# Altium PCB System Control.PcbDoc (part 4 of 7)
Units mil, origin at the board's own origin, x right, y up, seen from the top; angles counter-clockwise.
Board outline 5312.56 x 5103.22 mil, 12 copper layers (Top, GND 2, Signal 3, Signal 4, 3.3V 5, Signal 6, Signal 7, 2.5V 8, Signal 9, Signal 10, GND 11, Bottom); 503 components, 484 nets, 2219 pads, 1158 vias.
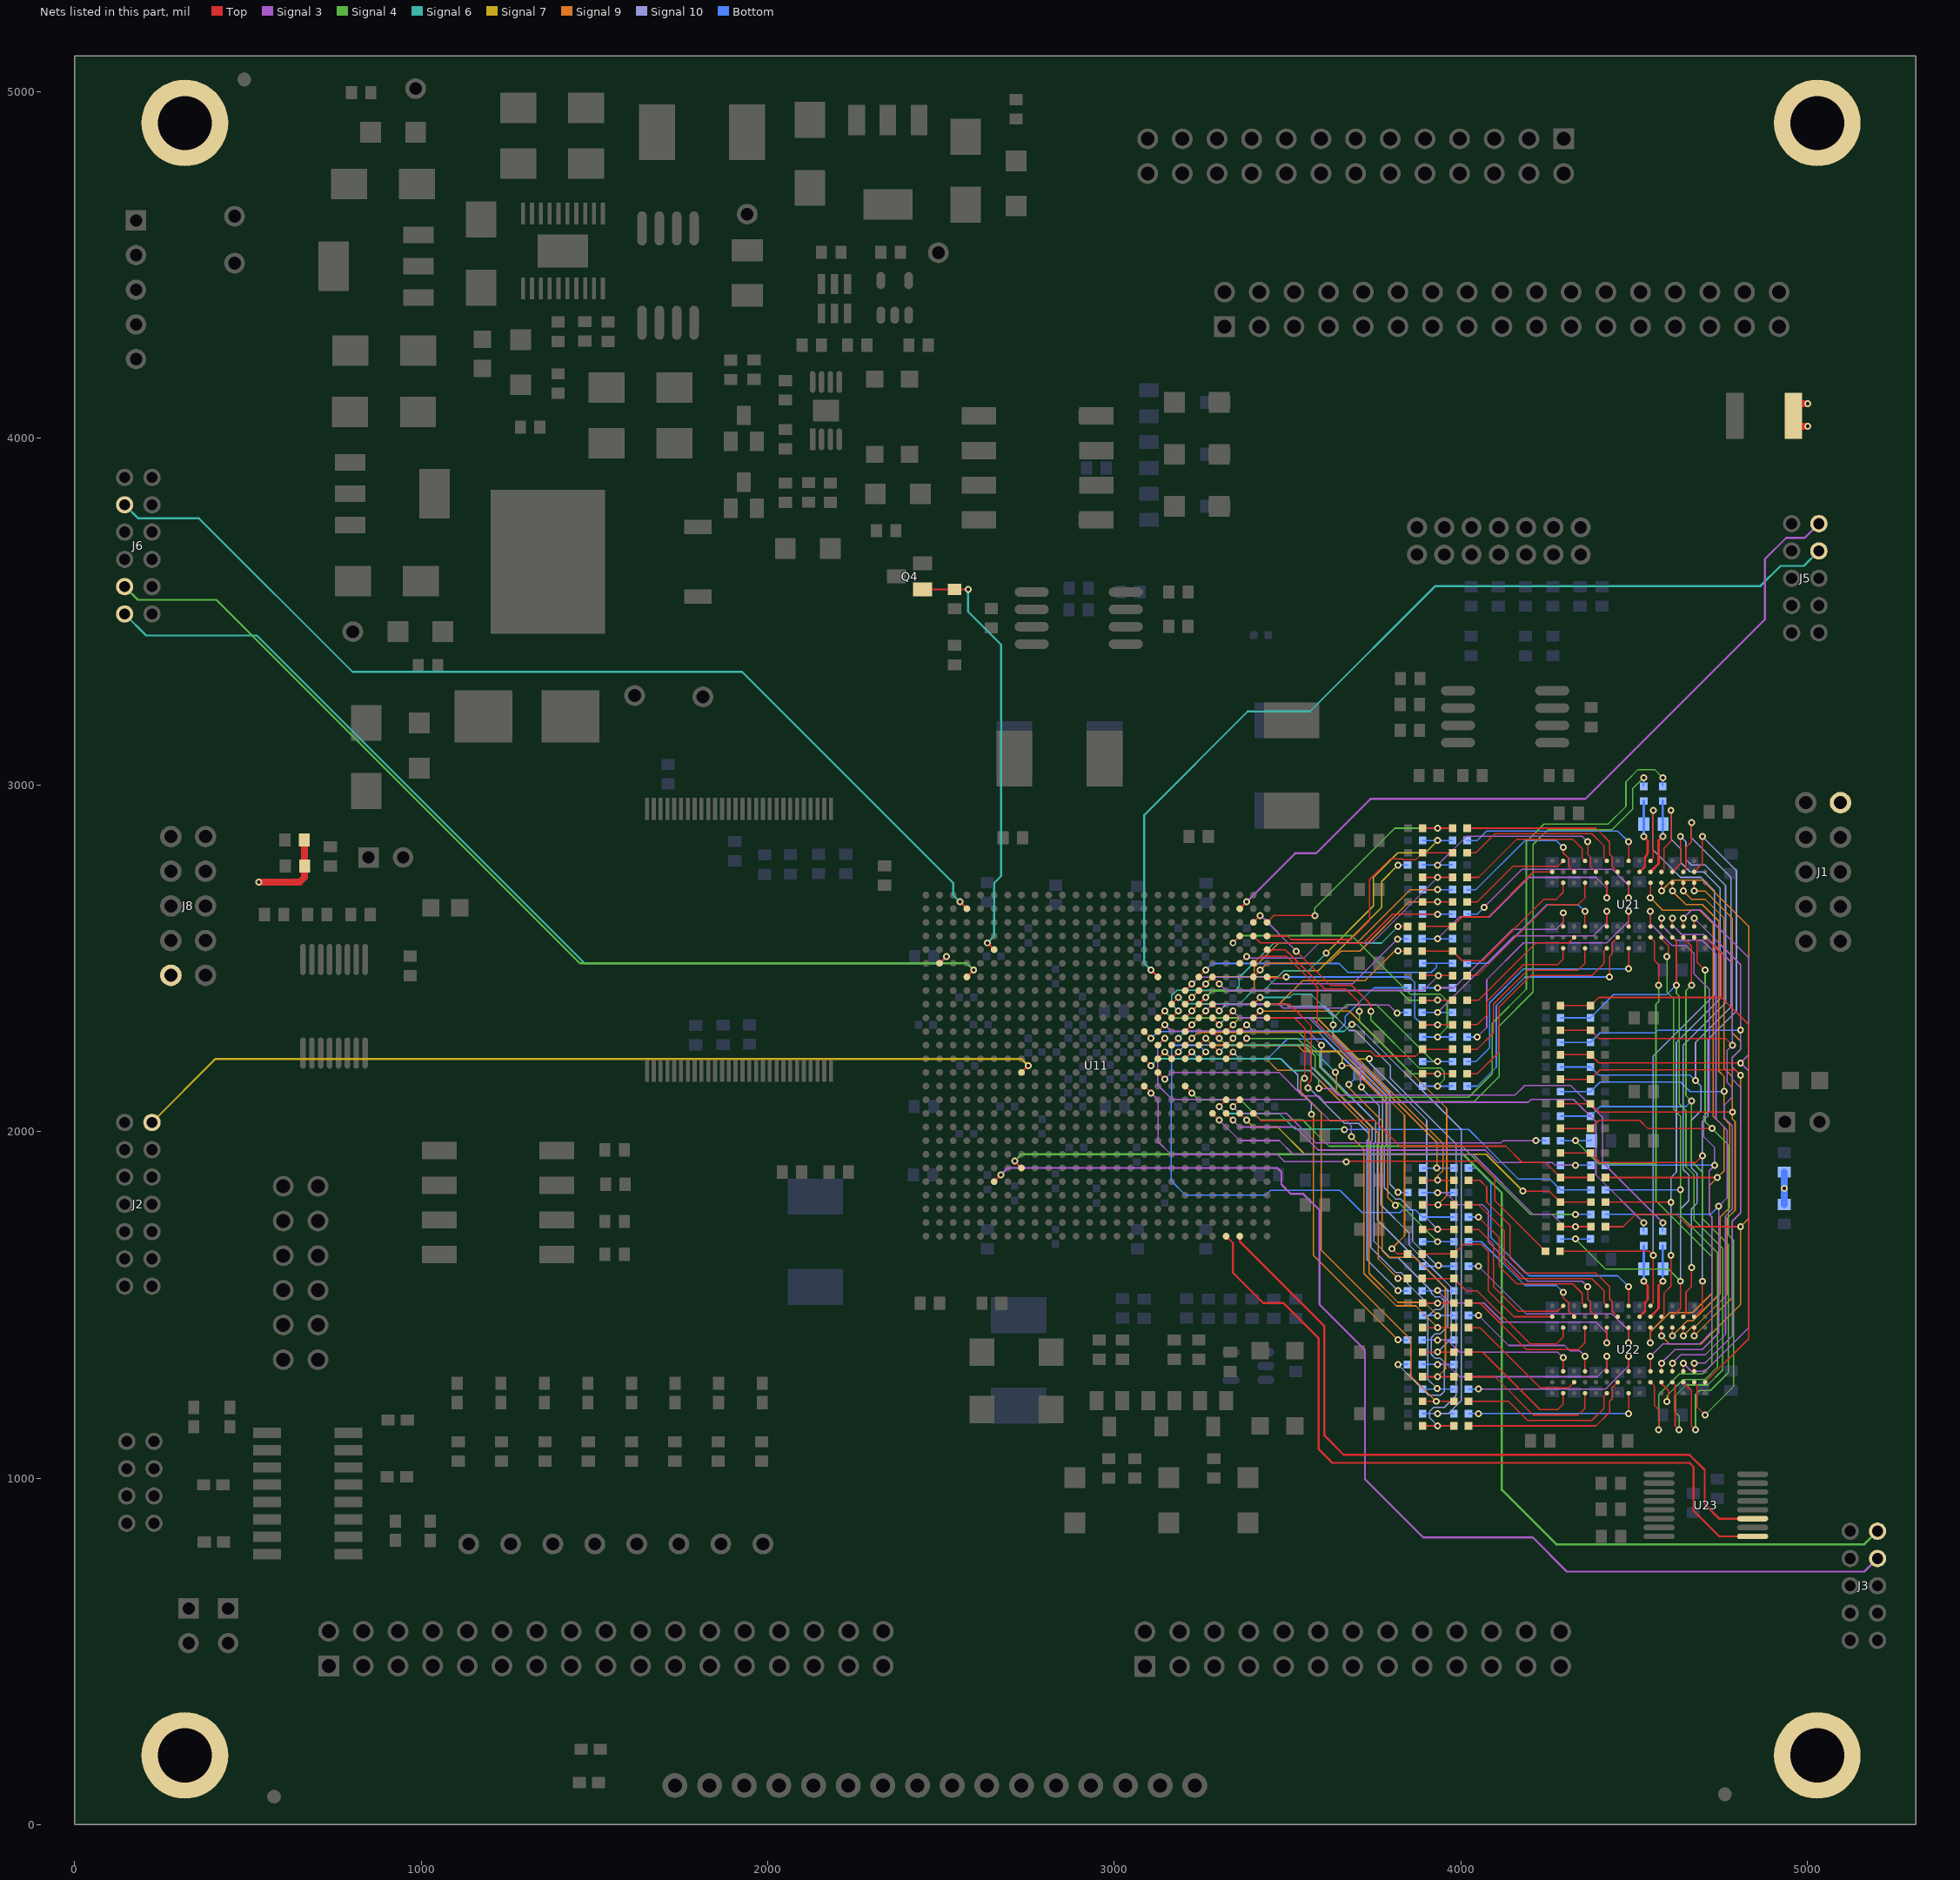
[diagram p14: the nets of this part, all layers, seen from the top]

## Via types
v1: diameter 20, hole 10, Top to Bottom, tented top, 1040 vias
v2: diameter 20, hole 8, Top to Bottom, tented top, 118 vias

## Nets (pads, with @x,y where several pads share a name; then routed paths per layer and width w, separated by ;. In a path a pad name is that pad's centre, name@x,y a point inside that pad or via, vN(x,y) a via of type N, cw(c..) or ccw(c..) an arc to the next point about the centre after c; other vN are vias at no path point) (continued)
DDR_BS0: R267.1 R280.2 U11.L4 | length 1201.5
  Top w4.02: v1(3302.7,2072.04) U11.L4@3322.39,2091.73
  Signal 6 w4.02: v1(3302.7,2072.04) 3322.75,2052 3475.7,2052 3520.61,2007.09 3661.83,2007.09 v1(3663.36,2005.56)
  Bottom w4.02: v1(3663.36,2005.56) 3663.36,2007 3664.08,2006.28 3664.57,2005.78 4022.51,2005.78 4074.36,1953.94 4164.91,1863.39 4255.46,1863.39 R267.1@4286.96,1831.89 R280.2@4374.88,1831.89
DDR_BS1: R268.1 R281.2 U11.M7 | length 1367.2
  Top w4.02: U11.M7@3204.28,2131.1 v1(3223.97,2111.42)
  Signal 4 w4.02: v1(3223.97,2111.42) 3243.65,2091.73 3364,2091.73 3421.77,2033.96 3542.96,2033.96 3619.04,1957.87 4003.49,1957.87 4200.34,1761.02 v1(4330.26,1761.02)
  Bottom w4.02: R268.1@4286.96,1761.02 v1(4330.26,1761.02) R281.2@4374.88,1761.02
DDR_C\A\S\: R111.1 R115.2 U11.K5 | length 1270.5
  Top w4.02: U11.K5@3283.02,2052.36 v1(3302.71,2032.67) ; R111.1@4286.96,1725.59 v1(4330.26,1725.59) R115.2@4374.88,1725.59
  Signal 3 w4.02: v1(3302.71,2032.67) 3361.38,1974 3475.58,1974 3515.33,1934.25 4034.99,1934.25 4208.22,1761.02 4263.34,1761.02 4298.77,1725.59 v1(4330.26,1725.59)
DDR_C\L\K\0\: R289.2 U11.R4 | length 2180.5
  Top w4.02: U11.R4@3322.39,2249.21 v1(3342.08,2268.9)
  Signal 4 w4.02: v1(3342.08,2268.9) 3361.76,2288.58 3529.42,2288.58 3592.36,2225.64 3592.36,2185.36 3678.72,2099 4022.57,2099 4090.11,2166.54 4090.11,2312.2 4188.53,2410.63 4188.53,2835.83 4239.71,2887.01 4424.75,2887.01 4475.93,2938.19 4475.93,3009.06 4511.37,3044.49 4558.61,3044.49 v1(4582.23,3020.87)
  Bottom w4.02: R289.2@4582.23,2995.94 v1(4582.23,3020.87)
DDR_C\L\K\1\: R290.2 U11.P10 | length 1846.8
  Top w4.02: U11.P10@3086.17,2209.84 v1(3105.86,2190.16)
  Signal 3 w4.02: v1(3589.68,2124.15) 3624.88,2124.15 3644.03,2105 4156,2105 4184.07,2133.07 4316.48,2133.07 4409,2040.55 4409,1910.63 v1(4582.23,1737.4)
  Signal 6 w4.02: v1(3105.86,2190.16) 3125.7,2210 3479,2210 3513.89,2175.11 3563.11,2175.11 3589.68,2148.54 v1(3589.68,2124.15)
  Bottom w4.02: R290.2@4582.23,1712.47 v1(4582.23,1737.4)
DDR_C\S\: R110.1 R114.2 U11.K3 | length 1119.1
  Top w4.02: U11.K3@3361.76,2052.36 v1(3381.45,2032.67) ; v1(4178.91,1828.11) 4255.3,1828.11 R110.1@4286.96,1796.46 R114.2@4374.88,1796.46
  Signal 7 w4.02: v1(3381.45,2032.67) 3401.12,2013 3470.55,2013 3549.2,1934.35 4072.67,1934.35 v1(4178.91,1828.11)
DDR_CKE: R265.2 U11.L3 | length 976.4
  Top w4.02: v1(3342.07,2072.04) U11.L3@3361.76,2091.73
  Signal 3 w4.02: v1(3342.07,2072.04) 3361.88,2052.24 3496.29,2052.24 3580.89,1967.64 4115.62,1967.64 4121.6,1973.62 v1(4216.09,1973.62)
  Bottom w4.02: v1(4216.09,1973.62) R265.2@4244.95,1973.62
DDR_CLK0: R284.2 U11.R3 | length 2052.7
  Top w4.02: U11.R3@3361.76,2249.21 v1(3381.45,2268.9)
  Signal 4 w4.02: v1(3381.45,2268.9) 3528.1,2268.9 3578.96,2218.04 3578.96,2180.04 3673,2086 4037.13,2086 4109.79,2158.66 4109.79,2304.33 4208.22,2402.76 4208.22,2827.95 4251.52,2871.26 4436.56,2871.26 4495.62,2930.31 4495.62,2989.37 v1(4527.11,3020.87)
  Bottom w4.02: R284.2@4527.11,2995.94 v1(4527.11,3020.87)
DDR_CLK1: R286.2 U11.N9 | length 1719.5
  Top w4.02: U11.N9@3125.54,2170.47 v1(3145.23,2150.79)
  Signal 3 w4.02: v1(3145.23,2150.79) 3165.44,2171 3474.81,2171 3542.79,2103.02 3564.82,2103.02 ; 3564.83,2103.03 3588.97,2103.03 3607.38,2084.62 4194.36,2084.62 4202.74,2093 4325.06,2093 4389.32,2028.74 4389.32,1875.2 v1(4527.11,1737.4)
  Bottom w4.02: R286.2@4527.12,1712.47 v1(4527.11,1737.4)
DDR_D0: R51.1 R76.1 U11.AD1 | length 703.7
  Top w4.02: U11.AD1@3440.5,2603.54 3460.19,2623.23 v1(3578.3,2623.23) ; R51.1@3889.32,2875.2 v1(3932.63,2875.2) R76.1@3975.93,2875.2
  Signal 4 w4.02: v1(3578.3,2623.23) 3578.3,2644.49 3809,2875.2 v1(3932.63,2875.2)
DDR_D1: R202.1 R230.1 U11.AD2 | length 907.5
  Top w4.02: U11.AD2@3401.13,2603.54 v1(3420.82,2623.23) ; v1(3524.79,2520.59) 3623.77,2421.61 3684.46,2421.61 3739.91,2366.16 v1(3739.91,2346.93)
  Signal 3 w4.02: v1(3420.82,2623.23) 3422.15,2623.23 v1(3524.79,2520.59)
  Signal 4 w4.02: v1@3740.12,2346.93 3740.12,2322.18 3878.83,2183.46 3940.75,2183.46 3952.47,2171.75 3952.47,2150.94 v1(3932.63,2131.1)
  Bottom w4.02: R202.1@3889.32,2131.1 v1(3932.63,2131.1) R230.1@3975.93,2131.1
DDR_D2: R195.1 R223.1 U11.AC2 | length 661.6
  Top w4.02: U11.AC2@3401.13,2564.17 3420.81,2544.49 3504.14,2544.49 3505.5,2543.13 3718.67,2543.13 3802.71,2627.17 v1(3932.63,2627.17)
  Bottom w4.02: R195.1@3889.32,2627.17 v1(3932.63,2627.17) R223.1@3975.93,2627.17
DDR_D3: R198.1 R226.1 U11.AC3 | length 934.5
  Top w4.02: v1(3342.07,2544.49) U11.AC3@3361.76,2564.17
  Signal 4 w4.02: v1(3342.07,2544.49) 3362.78,2565.19 3684.38,2565.19 3852.73,2396.85 3939.96,2396.85 3960.19,2376.63 3960.19,2300.39 v1(3932.63,2272.83)
  Bottom w4.02: R198.1@3889.32,2272.83 v1(3932.63,2272.83) R226.1@3975.93,2272.83
DDR_D4: R201.1 R231.1 U11.U9 | length 993.7
  Top w4.02: U11.U9@3125.54,2327.95 v1(3145.23,2347.64)
  Signal 4 w4.02: v1(3145.23,2347.64) 3165.07,2327.79 3631.64,2327.79 3669.71,2365.86 3755.89,2365.86 3919.79,2201.97 v1(3932.63,2201.97)
  Bottom w4.02: R201.1@3889.32,2201.97 v1(3932.63,2201.97) R231.1@3975.93,2201.97
DDR_D5: R192.1 R221.1 U11.V8 | length 1114.9
  Top w4.02: U11.V8@3164.91,2367.32 v1(3184.6,2387.01)
  Signal 7 w4.02: v1(3611.52,2515.27) 3747.59,2651.34 3747.59,2734.29 3817.63,2804.33 3897.19,2804.33 v1(3932.63,2839.76)
  Signal 6 w4.02: v1@3185.01,2387.01 v1(3184.6,2387.01) 3203.26,2368.35 3361.34,2368.35 3398.67,2405.67 3428.67,2405.67 3430.61,2405.67 3471.94,2447 3488.66,2463.72 3559.96,2463.72 v1(3611.52,2515.27) 3611.76,2515.27 v1@3611.64,2515.16
  Bottom w4.02: R192.1@3889.32,2839.76 v1(3932.63,2839.76) R221.1@3975.93,2839.76
DDR_D6: R60.1 R85.1 U11.AB1 | length 759.1
  Top w4.02: U11.AB1@3440.5,2524.8 3492.66,2524.8 3501.48,2515.98 3502.36,2515.98 3606.65,2411.69 3667.31,2411.69 3707,2372.01 v1(3707,2346.93) ; R60.1@3889.32,2166.53 R85.1@3975.93,2166.53
  Signal 4 w4.02: v1@3707.15,2346.93 3707.15,2317.21 3857.82,2166.54 3897.19,2166.54 v1@3932.63,2166.54
  other v1: 3932.63,2165.75
DDR_D7: R52.1 R77.1 U11.AC1 | length 714.8
  Top w4.02: U11.AC1@3440.5,2564.17 3440.67,2564 3500,2564 3510,2554 3682.22,2554 3682.64,2554.41 3736.4,2608.18 3736.4,2726.61 3797,2787.21 3830.14,2787.21 3832.71,2784.63 3869.62,2784.63 R52.1@3889.32,2804.33 3932.63,2804.33 R77.1@3975.93,2804.33
DDR_D8: R193.1 R224.1 U11.V7 | length 985.3
  Top w4.02: U11.V7@3204.28,2367.32 v1(3223.97,2387.01)
  Signal 9 w4.02: v1(3223.97,2387.01) 3243.65,2406.69 3393.69,2406.69 3403.1,2416.1 3403.1,2473.09 3474.5,2544.49 3700.34,2544.49 3853.89,2698.03 v1(3932.63,2698.03)
  Bottom w4.02: R193.1@3889.32,2698.03 v1(3932.63,2698.03) R224.1@3975.93,2698.03
DDR_D9: R56.1 R83.1 U11.V6 | length 803.4
  Top w4.02: R56.1@3889.32,2379.13 v1(3932.62,2379.11) R83.1@3975.93,2379.13
  Top w5.91: U11.V6@3243.65,2367.32 v1(3263.34,2387.01)
  Signal 4 w4.02: 3475.34,2406.69 3822.54,2406.69 3850.24,2379 3932.51,2379 v1(3932.62,2379.11)
  Signal 4 w5.91: v1(3263.34,2387.01) 3283.02,2406.69 3475.34,2406.69
DDR_D10: R58.1 R82.1 U11.Y5 | length 777.8
  Top w4.02: U11.Y5@3283.02,2446.06 v1(3302.71,2426.38) ; R58.1@3889.32,2450 3934.87,2450 R82.1@3975.93,2450
  Signal 3 w4.02: v1(3302.71,2426.38) 3322.08,2407 3891.95,2407 v1(3934.87,2449.92)
  Signal 7 w4.02: v1@3931.05,2446.1 v1(3934.87,2449.92)
DDR_D11: R196.1 R227.1 U11.Y6 | length 817.3
  Top w4.02: U11.Y6@3243.65,2446.06 v1(3263.34,2465.75)
  Bottom w4.02: v1(3263.34,2465.75) 3282.59,2485 3648.16,2485 3674.23,2458.93 3914.55,2458.93 3929.87,2474.25 3929.87,2485.43 ; R196.1@3889.32,2485.43 3929.87,2485.43 ; R227.1@3975.93,2485.43 3929.87,2485.43
DDR_D12: R61.1 R86.1 U11.AA2 | length 771.4
  Top w4.02: U11.AA2@3401.13,2485.43 3420.82,2505.12 3497.86,2505.12 3499,2503.98 3586.25,2416.73 3586.25,2402.01 3585.97,2401.74 3585.97,2312.79 3666.68,2232.09 3739.42,2232.09 3753.81,2217.7 3869.62,2217.7 R61.1@3889.32,2237.4 3932.63,2237.4 R86.1@3975.93,2237.4
DDR_D13: R54.1 R78.1 U11.AA3 | length 763.6
  Top w4.02: U11.AA3@3361.76,2485.43 v1(3381.45,2505.12) ; R54.1@3889.32,2733.46 v1(3932.63,2733.46) R78.1@3975.93,2733.46
  Signal 3 w4.02: v1(3381.45,2505.12) 3385.56,2501 3547,2501 3590.01,2544.01 3743.18,2544.01 v1(3932.63,2733.46)
DDR_D14: R59.1 R84.1 U11.Y1 | length 711.3
  Top w4.02: U11.Y1@3440.5,2446.06 3443.56,2443 3493,2443 v1(3496,2446) ; R59.1@3889.32,2308.27 v1(3932.63,2308.27) R84.1@3975.93,2308.27
  Bottom w4.02: v1@3489.04,2446 v1(3496,2446) ; v1@3489.04,2446.03 3850.53,2446.03 3867.13,2429.43 3867.13,2328.61 3887.47,2308.27 v1(3932.63,2308.27)
DDR_D15: R53.1 R79.1 U11.Y2 | length 707.8
  Top w4.02: U11.Y2@3401.13,2446.06 v1(3420.82,2465.75) ; R53.1@3889.32,2662.6 v1(3932.63,2662.6) R79.1@3975.93,2662.6
  Signal 9 w4.02: v1(3420.82,2465.75) 3440.5,2485.43 3475.34,2485.43 3617.67,2485.43 3626.92,2494.68 3628.33,2496.09 3653.1,2520.87 3708.22,2520.87 3849.95,2662.6 v1(3932.63,2662.6)
DDR_D16: R62.1 R87.1 U11.T7 | length 1112.9
  Top w4.02: U11.T7@3204.28,2288.58 v1(3223.97,2308.27) ; R62.1@3889.32,1859.45 v1(3932.63,1859.45) R87.1@3979.87,1859.45
  Signal 9 w4.02: v1(3223.97,2308.27) 3243.49,2327.79 3585.63,2327.79 3947.98,1965.45 3947.98,1887.62 3932.63,1872.27 v1(3932.63,1859.45)
DDR_D17: R72.1 R97.1 U11.V5 | length 1870.8
  Top w4.02: U11.V5@3283.02,2367.32 v1(3302.71,2347.64) ; R72.1@3889.32,1150.79 v1(3932.63,1150.79) R97.1@3979.87,1150.79
  Signal 10 w4.02: v1(3302.71,2347.64) 3322.07,2367 3497,2367 3502.78,2361.22 3608.05,2361.22 3677.65,2291.62 3694.38,2291.62 3796.8,2189.2 3796.8,2153.2 3986,1964 3986,1238 3952,1204 3921,1204 3909.02,1192.02 3909.02,1174.4 v1(3932.63,1150.79)
DDR_D18: R207.1 R237.1 U11.U5 | length 1267.8
  Top w4.02: U11.U5@3283.02,2327.95 v1(3302.71,2308.27)
  Signal 10 w4.02: v1(3302.71,2308.27) 3322.39,2327.95 3475.34,2327.95 3561.21,2327.95 3586.08,2303.08 3783.53,2105.63 3783.53,1958.76 3778.84,1954.07 3778.84,1837.74 3810.87,1805.71 3825.36,1805.71 3859.87,1771.2 3859.87,1684.17 3930.36,1613.69 v1(3934.9,1613.69)
  Bottom w4.02: R207.1@3889.32,1611.42 v1@3932.63,1611.42 ; v1(3934.9,1613.69) 3937.18,1611.42 R237.1@3979.87,1611.42
DDR_D19: R210.1 R241.1 U11.T9 | length 1800.1
  Top w4.02: U11.T9@3125.54,2288.58 v1(3145.23,2308.27)
  Signal 3 w4.02: v1(3145.23,2308.27) 3163.89,2289.61 3277.61,2289.61 3557.66,2289.61 v1@3597.43,2249.84
  Signal 10 w4.02: v1@3596.88,2249.08 3596.88,2185.71 3753.76,2028.82 3753.76,1971.09 3749.07,1966.4 3749.07,1682.93 3796,1636 3818.93,1636 3914.31,1540.62 3914.31,1534.16 3925.05,1523.43 3940.21,1523.43 3950.93,1512.7 3950.93,1497.54 3940.21,1486.81 3925.04,1486.81 3904.39,1466.16 3904.39,1285.32 3931,1258.71 v1(3931,1259)
  Bottom w4.02: R210.1@3889.32,1257.09 v1@3932.63,1257.09 ; v1(3931,1259) 3931,1258.71 v1@3932.63,1257.09 ; R241.1@3979.87,1257.09 v1@3932.63,1257.09
  other v1: 3597.43,2249.09
DDR_D20: R213.1 R242.1 U11.R8 | length 1944.5
  Top w4.02: U11.R8@3164.91,2249.21 v1(3184.6,2268.9)
  Signal 10 w4.02: v1(3684.99,2309.34) 3697.61,2309.34 4000.62,2006.33 4000.62,1223.62 3963.22,1186.22 v1(3932.63,1186.22)
  Signal 6 w4.02: v1(3184.6,2268.9) 3205.3,2289.61 3310.44,2289.61 3622.64,2289.61 3623.22,2289.03 3662.58,2289.03 3681,2307.44 3684.99,2307.44 v1(3684.99,2309.34)
  Bottom w4.02: R213.1@3889.32,1186.22 v1(3932.63,1186.22) R242.1@3979.87,1186.22
DDR_D21: R203.1 R233.1 U11.R7 | length 1038.2
  Top w4.02: U11.R7@3204.28,2249.21 v1(3223.97,2268.9)
  Signal 9 w4.02: v1(3223.97,2268.9) 3241.68,2286.61 3612.78,2286.61 3930.81,1968.58 3930.81,1895.51 v1(3930.26,1894.96)
  Bottom w4.02: R203.1@3889.32,1894.88 3930.26,1894.88 R233.1@3979.87,1894.88
DDR_D22: R71.1 R96.1 U11.U1 | length 1465.1
  Top w4.02: U11.U1@3440.5,2327.95 3518.84,2327.95 3548.88,2297.91 3548.88,2154.01 v1(3548.49,2153.62) ; R71.1@3889.32,1221.65 3932.62,1221.65 R96.1@3979.87,1221.65
  Signal 9 w4.02: v1(3548.49,2153.62) 3545.12,2153.62 3538,2146.51 3538,2114 3596.76,2055.24 3596.76,1658.02 3855.77,1399 3855.77,1293.23 3927.35,1221.65 3931.4,1221.65 3932.62,1220.44 3931.34,1221.72 v1(3929.21,1221.72)
DDR_D23: R63.1 R88.1 U11.U2 | length 1061.4
  Top w4.02: U11.U2@3401.13,2327.95 v1(3420.82,2347.64) ; R63.1@3889.32,1788.58 R88.1@3979.87,1788.58
  Signal 9 w4.02: v1(3420.82,2347.64) 3678.09,2347.64 3958.88,2066.85 3958.88,1814.85 3953.65,1809.61 3933.88,1789.84 v1(3933.88,1788.59)
DDR_D24: R205.1 R235.1 U11.T5 | length 1181.2
  Top w4.02: U11.T5@3283.02,2288.58 v1(3302.71,2268.9) ; v1@3810.63,1793.47 v1@3811.17,1794.01 ; v1(3811.19,1787.36) v1@3811.19,1793.99
  Signal 4 w4.02: v1(3811.19,1787.36) 3811.19,1793.99 3820.9,1794.01 v1(3932.63,1682.28)
  Signal 9 w4.02: v1(3656.88,2190.51) 3678.49,2190.51 3789,2080 3789,1809.55 v1(3811.19,1787.36)
  Signal 7 w4.02: v1(3302.71,2268.9) 3322.55,2249.05 3558.01,2249.05 3575.69,2231.37 3625.94,2231.37 3626.08,2231.5 3640.75,2231.5 3656.88,2215.37 v1(3656.88,2190.51)
  Bottom w4.02: R205.1@3889.32,1682.28 v1(3932.63,1682.28) R235.1@3979.87,1682.28
DDR_D25: R68.1 R93.1 U11.R9 | length 1587.4
  Top w4.02: U11.R9@3125.54,2249.21 v1(3145.23,2268.9) ; R68.1@3889.32,1434.25 v1(3932.63,1434.25) R93.1@3979.87,1434.25
  Signal 3 w4.02: v1(3145.23,2268.9) 3125,2248.67 3125,2134.22 3166.12,2093.1 3559.9,2093.1 3621.37,2031.63 3668.99,2031.63 3683.69,2016.93 v1(3683.69,1985.95)
  Signal 9 w4.02: v1(3683.69,1985.95) 3683.69,1985.31 3720.03,1948.97 3720.03,1590.82 3813.53,1497.32 3869.68,1497.32 3932.63,1434.37 v1(3932.63,1434.25)
DDR_D26: R66.1 R91.1 U11.P8 | length 1421.4
  Top w4.02: U11.P8@3164.91,2209.84 v1(3184.6,2229.53) ; R66.1@3889.32,1505.12 v1(3932.63,1505.12) R91.1@3979.87,1505.12
  Signal 10 w4.02: v1(3184.6,2229.53) 3204.28,2249.21 3543.79,2249.21 3568.15,2224.85 3568.15,2187.15 3743.84,2011.46 3743.84,1975.2 3739.15,1970.51 3739.15,1665.67 3811.11,1593.7 3826.3,1593.7 3846,1574 3846,1561.43 3902.31,1505.12 v1(3932.63,1505.12)
DDR_D27: R208.1 R238.1 U11.P9 | length 1464.6
  Top w4.02: U11.P9@3125.54,2209.84 v1(3145.23,2229.53)
  Signal 9 w4.02: v1(3145.23,2229.53) 3164.91,2209.84 3438,2209.84 3470.89,2176.95 3562.95,2176.95 3734.55,2005.35 3734.55,1590.75 3818.06,1507.24 3895.05,1507.24 v1@3932.62,1469.68
  Bottom w4.02: R208.1@3889.32,1469.68 v1@3932.63,1469.68 ; v1(3932.62,1468.5) v1@3932.62,1469.68 ; R238.1@3979.87,1469.68 v1@3932.63,1469.68
DDR_D28: R70.1 R94.1 U11.P7 | length 1715.4
  Top w4.02: U11.P7@3204.28,2209.84 v1(3223.97,2229.53) ; R70.1@3889.32,1292.52 v1(3932.63,1292.52) R94.1@3979.87,1292.52
  Signal 9 w4.02: v1(3676.72,2135.43) 3676.72,2126.89 3772.15,2031.45 3772.15,1656.85 3792,1637 3867,1637 3955,1549 3955,1315 3932.63,1292.63 v1(3932.63,1292.52)
  Bottom w4.02: v1(3223.97,2229.53) 3242.49,2211 3287.58,2211 3287.61,2211.04 3317.8,2211.04 3317.84,2211 3329.58,2211 3329.61,2211.04 3359.8,2211.04 3360.84,2210 3442,2210 3498.81,2266.81 3605.72,2266.81 3690.5,2182.03 3690.5,2149.21 v1(3676.72,2135.43)
DDR_D29: R206.1 R234.1 U11.P6 | length 1397.9
  Top w4.02: U11.P6@3243.65,2209.84 v1(3263.34,2229.53)
  Bottom w4.02: v1(3263.34,2229.53) 3243.86,2249 3174,2249 3165,2240 3165,2088.42 3163.71,2087.14 3163.71,1857.76 3204.47,1817 3437,1817 3450.57,1830.57 3650.49,1830.57 3714.83,1766.22 3824.41,1766.22 3832.22,1774.03 3868.44,1774.03 R206.1@3889.32,1753.15 R234.1@3979.87,1753.15
DDR_D30: R69.1 R95.1 U11.T3 | length 1437.5
  Top w4.02: U11.T3@3361.76,2288.58 v1(3381.45,2308.27) ; R69.1@3889.32,1363.39 v1@3932.62,1363.39 ; v1(3932.62,1364.6) v1@3932.62,1363.39 ; R95.1@3979.87,1363.39 v1@3932.63,1363.39
  Signal 10 w4.02: v1(3381.45,2308.27) 3401.71,2288 3479,2288 3587.13,2288 3773.6,2101.52 3773.6,1962.87 3768.92,1958.18 3768.92,1789.21 3849.95,1708.17 3849.95,1672.76 3924.16,1598.54 3971.61,1551.09 3971.61,1402.37 3933.39,1364.15 3933.07,1364.15 v1(3932.62,1364.6)
DDR_D31: R64.1 R89.1 U11.T4 | length 1142.9
  Top w4.02: U11.T4@3322.39,2288.58 v1(3342.08,2308.27) ; R64.1@3889.32,1717.72 v1(3932.63,1717.72) R89.1@3979.87,1717.72
  Signal 10 w4.02: v1(3735.78,2209.84) 3735.78,2198.22 3901.13,2032.87 3901.13,1749.21 v1(3932.63,1717.72)
  Signal 7 w4.02: v1(3342.08,2308.27) 3361.76,2327.95 3475.34,2327.95 3475.42,2328.03 3583.43,2328.03 3701.61,2209.84 v1(3735.78,2209.84)
DDR_L\D\Q\S\0\: R194.1 U11.W6 | length 796.2
  Top w4.02: U11.W6@3243.65,2406.69 v1(3263.34,2426.38)
  Signal 7 w4.02: v1(3263.34,2426.38) 3283.02,2446.06 3453,2446.06 3471.01,2446.06 3488.66,2463.72 3588.09,2463.72 3771.21,2646.83 3771.21,2721.65 v1(3818.45,2768.9)
  Bottom w4.02: v1(3818.45,2768.9) R194.1@3846.01,2768.9
DDR_L\D\Q\S\1\: R55.1 U11.U8 | length 858.8
  Top w4.02: U11.U8@3164.91,2327.95 v1(3184.6,2347.64) ; v1(3818.45,2591.73) R55.1@3846.01,2591.73
  Signal 6 w4.02: v1(3184.6,2347.64) 3165,2367.23 3165,2392.47 3180.53,2408 3348.75,2408 3359.79,2419.04 3359.79,2443.79 3460,2544 3770.72,2544 v1(3818.45,2591.73)
DDR_LDM0: R200.1 U11.U6 | length 646.7
  Top w4.02: U11.U6@3243.65,2327.95 v1(3263.34,2347.64)
  Signal 3 w4.02: v1(3263.34,2347.64) 3283.02,2367.32 3475.34,2367.32 3486.67,2356 3668,2356 3676.64,2364.64 3792.47,2364.64 3813.45,2343.66 3815.58,2343.66 3814.51,2342.6 v1(3815.54,2341.57)
  Bottom w4.02: v1@3807.48,2343.7 3815.54,2343.7 R200.1@3846.01,2343.7
DDR_LDM1: R211.1 U11.U4 | length 1769.3
  Top w4.02: U11.U4@3322.39,2327.95 v1(3342.08,2347.64)
  Signal 3 w4.02: v1(3342.08,2347.64) 3361.76,2327.95 3569.05,2327.95 3709.71,2187.29 3709.71,2128.7 3710.01,2129 v1(3713,2129)
  Signal 10 w4.02: v1(3713,2129) 3710.01,2129 3709.71,2128.7 3763.68,2074.73 3763.68,1966.98 3758.99,1962.29 3758.99,1744.98 3961.69,1542.28 3961.69,1437.42 3960.85,1436.59 3940.21,1415.94 3925.06,1415.94 3914.31,1405.2 3914.31,1357.02 3925.07,1346.26 3940.21,1346.26 3952.35,1334.12 3952.35,1250.92 3940.86,1239.43 3906.97,1239.43 v1(3818.45,1327.95)
  Bottom w4.02: v1(3818.45,1327.95) R211.1@3846.01,1327.95
DDR_LDQS0: R197.1 U11.W7 | length 718.4
  Top w4.02: U11.W7@3204.28,2406.69 v1(3223.97,2426.38)
  Signal 3 w4.02: v1(3223.97,2426.38) 3242.59,2445 3440,2445 3458,2427 3688.44,2427 v1(3817.12,2555.67)
  Bottom w4.02: v1(3817.12,2555.67) R197.1@3846.01,2556.3
DDR_LDQS1: R57.1 U11.U7 | length 721.6
  Top w4.02: U11.U7@3204.28,2327.95 v1(3223.97,2347.64) ; v1(3818.45,2520.87) R57.1@3846.01,2520.87
  Signal 9 w4.02: v1(3223.97,2347.64) 3243.65,2367.32 3475.34,2367.32 3543.59,2435.57 3722.78,2435.57 3808.08,2520.87 v1(3818.45,2520.87)
DDR_MEM_A0: R269.1 R282.1 U21.M8 U22.M8 | length 2091.8
  Top w4.02: U22.M8@4609.79,1465.75 4633.41,1489.37 v1(4633.41,1568.11) ; U21.M8@4609.79,2749.21 4633.41,2772.83 v1(4633.41,2851.57)
  Signal 4 w4.02: v1(4330.26,1690.16) 4416.88,1603.54 4597.98,1603.54 v1(4633.41,1568.11)
  Signal 10 w4.02: v1(4633.41,1568.11) 4633.41,1776.77 4657.04,1800.39 4657.04,1875.2 4641.29,1890.94 4641.29,2249.21 4763.34,2371.26 4763.34,2709.84 4704.28,2768.9 4664.91,2768.9 4649.16,2784.65 4649.16,2835.83 v1(4633.41,2851.57)
  Bottom w4.02: R269.1@4286.96,1690.16 v1(4330.26,1690.16) R282.1@4373.57,1690.16
DDR_MEM_A1: R103.1 R117.1 U21.M3 U22.M3 | length 2099.2
  Top w4.02: R103.1@4286.96,2292.52 R117.1@4373.57,2292.52 4397.19,2268.9 4763.34,2268.9 v1(4783.02,2249.21) ; U22.M3@4609.79,1308.27 v1(4609.79,1331.89) ; U21.M3@4609.79,2591.73 v1(4609.79,2615.35)
  Signal 3 w4.02: v1(4609.79,1331.89) 4633.41,1355.51 4704.28,1355.51 4763.34,1414.57 4763.34,1757.09 4783.02,1776.77 4783.02,2016.93 4759.4,2040.55 4759.4,2075.98 4783.02,2099.61 4783.02,2127.17 4767.27,2142.91 4767.27,2233.46 v1(4783.02,2249.21) 4783.02,2485.43 4700.34,2568.11 4637.35,2568.11 4609.79,2595.67 v1(4609.79,2615.35)
DDR_MEM_A2: R263.1 R277.1 U21.M7 U22.M7 | length 1999.9
  Top w4.02: v1(4609.79,1410.63) U22.M7@4609.79,1434.25 ; v1(4609.79,2694.09) U21.M7@4609.79,2717.72
  Signal 9 w4.02: v1(4609.79,1410.63) 4653.1,1453.94 4668.85,1453.94 4747.59,1532.68 4747.59,1753.15 4775.15,1780.71 4775.15,2020.87 4759.4,2036.61 v1(4759.4,2115.35) 4759.4,2158.66 4743.65,2174.41 4743.65,2607.48 4696.41,2654.72 4649.16,2654.72 v1(4609.79,2694.09)
  Bottom w4.02: R263.1@4286.96,2115.35 R277.1@4373.57,2115.35 4401.13,2142.91 4633.41,2142.91 4660.97,2115.35 v1(4759.4,2115.35)
DDR_MEM_A3: R264.1 R279.1 U21.N2 U22.N2 | length 2094.1
  Top w4.02: U22.N2@4641.29,1276.77 4664.91,1253.15 4664.91,1150.79 v1(4676.72,1138.98) ; U21.N2@4641.29,2560.24 4664.91,2536.61 v1(4664.91,2422.44)
  Signal 4 w4.02: v1(4664.91,2422.44) 4649.16,2406.69 4649.16,2103.54 v1(4664.91,2087.8) 4664.91,1914.57 4696.41,1883.07 4696.41,1749.21 4771.21,1674.41 4771.21,1304.33 4720.03,1253.15 4688.53,1253.15 4676.72,1241.34 v1(4676.72,1138.98)
  Bottom w4.02: R264.1@4286.96,2044.49 R279.1@4373.57,2044.49 4401.13,2072.05 4649.16,2072.05 v1(4664.91,2087.8)
DDR_MEM_A4: R262.1 R276.1 U21.N8 U22.N8 | length 2113.2
  Top w4.02: U22.N8@4641.29,1465.75 4649.16,1473.62 4649.16,1536.61 4664.91,1552.36 v1(4664.91,1607.48) ; U21.N8@4641.29,2749.21 4649.16,2757.09 4649.16,2820.08 4664.91,2835.83 v1(4664.91,2890.94)
  Signal 10 w4.02: v1(4664.91,1607.48) 4664.91,1776.77 4680.66,1792.52 4680.66,1879.13 4664.91,1894.88 4664.91,2032.68 4692.47,2060.24 4692.47,2131.1 v1(4676.72,2146.85) 4676.72,2257.09 4779.08,2359.45 4779.08,2733.46 4664.91,2847.64 v1(4664.91,2890.94)
  Bottom w4.02: R262.1@4286.96,2186.22 R276.1@4373.57,2186.22 4397.19,2162.6 4660.97,2162.6 v1(4676.72,2146.85)
DDR_MEM_A5: R104.1 R119.1 U21.N3 U22.N3 | length 2170
  Top w4.02: R104.1@4286.96,2221.65 R119.1@4373.57,2221.65 4397.19,2198.03 v1(4806.64,2198.03) ; U22.N3@4641.29,1308.27 v1(4641.29,1331.89) ; U21.N3@4641.29,2591.73 v1(4641.29,2615.35)
  Signal 3 w4.02: v1(4641.29,1331.89) 4664.91,1308.27 4704.28,1308.27 4830.26,1434.25 4830.26,2174.41 v1(4806.64,2198.03) 4830.26,2221.65 4830.26,2501.18 4692.47,2638.98 4664.91,2638.98 v1(4641.29,2615.35)
DDR_MEM_A6: R105.1 R120.1 U21.N7 U22.N7 | length 1988.2
  Top w4.02: R105.1@4286.96,2079.92 R120.1@4373.57,2079.92 4397.19,2056.3 v1(4783.02,2056.3) ; v1(4641.29,1410.63) U22.N7@4641.29,1434.25 ; v1(4641.29,2694.09) U21.N7@4641.29,2717.72
  Signal 9 w4.02: v1(4641.29,1410.63) 4668.85,1438.19 4676.72,1438.19 4767.27,1528.74 4767.27,1749.21 4790.89,1772.83 4790.89,2028.74 4783.02,2036.61 v1(4783.02,2056.3) 4783.02,2158.66 4759.4,2182.28 4759.4,2615.35 4704.28,2670.47 4664.91,2670.47 v1(4641.29,2694.09)
DDR_MEM_A7: R107.1 R122.1 U21.P2 U22.P2 | length 2023.6
  Top w4.02: R107.1@4286.96,2009.06 R122.1@4373.57,2009.06 4397.19,2032.68 4515.3,2032.68 4538.93,2009.06 v1(4723.97,2009.06) ; U22.P2@4672.78,1276.77 4680.66,1268.9 4680.66,1205.91 v1(4704.28,1182.28) ; U21.P2@4672.78,2560.24 4680.66,2552.36 4680.66,2489.37 v1(4704.28,2465.75)
  Signal 4 w4.02: v1(4704.28,1182.28) 4786.96,1264.96 4786.96,1686.22 4771.21,1701.97 4771.21,1961.81 v1(4723.97,2009.06) 4704.28,2028.74 v1(4704.28,2465.75)
DDR_MEM_A8: R109.1 R123.1 U21.P8 U22.P8 | length 2018.3
  Top w4.02: R109.1@4286.96,1938.19 R123.1@4373.57,1938.19 4401.13,1910.63 4676.72,1910.63 v1(4696.41,1930.31) ; U22.P8@4672.78,1465.75 4696.41,1489.37 v1(4696.41,1568.11) ; U21.P8@4672.78,2749.21 4696.41,2772.83 v1(4696.41,2851.57)
  Signal 10 w4.02: v1(4696.41,1568.11) v1(4696.41,1930.31) 4696.41,2028.74 4712.15,2044.49 4712.15,2264.96 4794.83,2347.64 4794.83,2753.15 v1(4696.41,2851.57)
DDR_MEM_A9: R261.1 R274.1 U21.P3 U22.P3 | length 2014
  Top w4.02: U22.P3@4672.78,1308.27 v1(4672.78,1331.89) ; U21.P3@4672.78,2591.73 v1(4672.78,2615.35)
  Signal 3 w4.02: v1(4672.78,1331.89) 4704.28,1331.89 4783.02,1410.63 4783.02,1741.34 4806.64,1764.96 4806.64,2127.17 4783.02,2150.79 4783.02,2213.78 4806.64,2237.4 v1(4806.64,2292.52) 4806.64,2481.5 v1(4672.78,2615.35)
  Bottom w4.02: R261.1@4286.96,2257.09 R274.1@4373.57,2257.09 4401.13,2284.65 4558.61,2284.65 4566.48,2292.52 v1(4806.64,2292.52)
DDR_MEM_A10: R260.1 R273.1 U21.M2 U22.M2 | length 2100.2
  Top w4.02: U22.M2@4609.79,1276.77 4617.67,1268.9 4617.67,1150.79 v1(4629.48,1138.98) ; U21.M2@4609.79,2560.24 4621.6,2548.43 v1(4621.6,2422.44)
  Signal 4 w4.02: v1(4621.6,2422.44) 4621.6,2398.82 4629.48,2390.94 4629.48,2079.92 4649.16,2060.24 4649.16,1898.82 4672.78,1875.2 4672.78,1745.28 4755.46,1662.6 4755.46,1312.2 4712.15,1268.9 4649.16,1268.9 4617.67,1237.4 4617.67,1190.16 4629.48,1178.35 v1(4629.48,1138.98)
  Bottom w4.02: R260.1@4286.96,2327.95 R273.1@4373.57,2327.95 4440.5,2394.88 4594.04,2394.88 v1(4621.6,2422.44)
DDR_MEM_A11: R106.1 R121.1 U21.P7 U22.P7 | length 2017.2
  Top w4.02: R106.1@4286.96,2150.79 R121.1@4373.57,2150.79 4401.13,2178.35 4790.89,2178.35 v1(4806.64,2162.6) ; v1(4672.78,1410.63) U22.P7@4672.78,1434.25 ; v1(4672.78,2694.09) U21.P7@4672.78,2717.72
  Signal 9 w4.02: v1(4672.78,1410.63) 4783.02,1520.87 4783.02,1741.34 4806.64,1764.96 v1(4806.64,2162.6) 4783.02,2186.22 4783.02,2213.78 4806.64,2237.4 4806.64,2261.02 4783.02,2284.65 4783.02,2615.35 4704.28,2694.09 v1(4672.78,2694.09)
DDR_MEM_A12: R102.1 R118.1 U21.R2 U22.R2 | length 1862.2
  Top w4.02: R102.1@4286.96,2363.39 R118.1@4373.57,2363.39 4397.19,2387.01 4751.52,2387.01 ; U22.R2@4704.28,1276.77 4830.26,1402.76 4830.26,2308.27 4751.52,2387.01 ; U21.R2@4704.28,2560.24 4751.52,2512.99 4751.52,2387.01
DDR_MEM_BS0: R280.1 U21.L2 U22.L2 | length 1787.4
  Top w4.02: U22.L2@4578.3,1276.77 4578.3,1272.83 4597.98,1253.15 4597.98,1225.59 v1(4594.04,1221.65) ; U21.L2@4578.3,2560.24 4578.3,2556.3 4597.98,2536.61 4597.98,2509.06 v1(4594.04,2505.12)
  Signal 4 w4.02: v1(4594.04,1221.65) 4594.04,1237.4 4641.29,1284.65 4704.28,1284.65 4739.71,1320.08 4739.71,1650.79 4633.41,1757.09 v1(4633.41,1831.89) 4633.41,2044.49 4613.73,2064.17 4613.73,2383.07 4594.04,2402.76 v1(4594.04,2505.12)
  Bottom w4.02: R280.1@4416.88,1831.89 v1(4633.41,1831.89)
DDR_MEM_BS1: R281.1 U21.L3 U22.L3 | length 1913.8
  Top w4.02: U22.L3@4578.3,1308.27 v1(4578.3,1331.89) ; U21.L3@4578.3,2591.73 v1(4578.3,2615.35)
  Signal 3 w4.02: v1(4578.3,1331.89) 4617.67,1371.26 4696.41,1371.26 4743.65,1418.5 v1(4743.65,1784.65) 4767.27,1808.27 4767.27,2005.12 4735.78,2036.61 4735.78,2512.99 4696.41,2552.36 4621.6,2552.36 4578.3,2595.67 v1(4578.3,2615.35)
  Bottom w4.02: R281.1@4416.88,1761.02 4720.03,1761.02 v1(4743.65,1784.65)
DDR_MEM_C\A\S\: R115.1 U21.L7 U22.L7 | length 2172.6
  Top w4.02: R115.1@4416.88,1725.59 4468.06,1725.59 4503.49,1761.02 4621.6,1761.02 4657.04,1725.59 v1(4806.64,1725.59) ; v1(4578.3,1410.63) U22.L7@4578.3,1434.25 ; v1(4578.3,2694.09) U21.L7@4578.3,2717.72
  Signal 9 w4.02: v1(4578.3,1410.63) 4601.92,1387.01 4692.47,1387.01 4806.64,1501.18 v1(4806.64,1725.59) 4830.26,1749.21 4830.26,2591.73 4696.41,2725.59 4609.79,2725.59 v1(4578.3,2694.09)
DDR_MEM_C\L\K\0\: R285.2 R289.1 U21.K8 | length 629.7
  Top w7.01: U21.K8@4546.8,2749.21 4570.42,2772.83 4570.42,2839.76 v1(4582.23,2851.57)
  Bottom w7.01: R285.2@4583.12,2887.01 R285.2@4582.23,2887.01 ; v1(4582.23,2851.57) R285.2@4582.23,2887.01 ; v1(4582.23,2851.57) R285.2@4582.23,2887.01 ; v1(4582.23,2851.57) R285.2@4582.23,2887.01 ; v1(4582.23,2851.57) R285.2@4582.23,2887.01 ; v1(4582.23,2851.57) R285.2@4582.23,2887.01 ; R285.2@4582.23,2887.01 R289.1@4582.23,2953.94 ; R285.2@4582.23,2887.01 R289.1@4582.23,2953.94 ; R285.2@4582.23,2887.01 R289.1@4582.23,2953.94 ; R285.2@4582.23,2887.01 R289.1@4582.23,2953.94 ; R285.2@4582.23,2887.01 R289.1@4582.23,2953.94
DDR_MEM_C\L\K\1\: R287.2 R290.1 U22.K8 | length 629.7
  Top w7.01: U22.K8@4546.8,1465.75 4570.42,1489.37 4570.42,1556.3 v1(4582.23,1568.11)
  Bottom w7.01: R287.2@4583.12,1603.54 R287.2@4582.23,1603.54 ; v1(4582.23,1568.11) R287.2@4582.23,1603.54 ; v1(4582.23,1568.11) R287.2@4582.23,1603.54 ; v1(4582.23,1568.11) R287.2@4582.23,1603.54 ; v1(4582.23,1568.11) R287.2@4582.23,1603.54 ; v1(4582.23,1568.11) R287.2@4582.23,1603.54 ; R287.2@4582.23,1603.54 R290.1@4582.23,1670.47 ; R287.2@4582.23,1603.54 R290.1@4582.23,1670.47 ; R287.2@4582.23,1603.54 R290.1@4582.23,1670.47 ; R287.2@4582.23,1603.54 R290.1@4582.23,1670.47 ; R287.2@4582.23,1603.54 R290.1@4582.23,1670.47
DDR_MEM_C\S\: R114.1 U21.L8 U22.L8 | length 1990.1
  Top w4.02: R114.1@4416.88,1796.46 v1(4605.85,1796.46) ; U22.L8@4578.3,1465.75 4586.17,1473.62 4586.17,1534.65 4605.85,1554.33 v1(4605.85,1642.91) ; U21.L8@4578.3,2749.21 4586.17,2757.09 4586.17,2818.11 4605.85,2837.8 v1(4605.85,2926.38)
  Signal 10 w4.02: v1(4605.85,1642.91) v1(4605.85,1796.46) 4605.85,1867.32 4621.6,1883.07 4621.6,2257.09 4747.59,2383.07 4747.59,2701.97 4700.34,2749.21 4660.97,2749.21 4633.41,2776.77 4633.41,2816.14 4605.85,2843.7 v1(4605.85,2926.38)
DDR_MEM_CKE: R265.1 R275.2 U21.K2 U22.K2 | length 2116.6
  Top w4.02: U22.K2@4546.8,1276.77 4558.61,1264.96 4558.61,1209.84 4570.42,1198.03 v1(4570.42,1138.98) ; U21.K2@4546.8,2560.24 4558.61,2548.43 4558.61,2493.31 4570.42,2481.5 v1(4570.42,2422.44)
  Signal 4 w4.02: v1(4330.26,1973.62) 4397.19,1906.69 4562.55,1906.69 ; v1(4570.42,1138.98) 4570.42,1241.34 4629.48,1300.39 4696.41,1300.39 4723.97,1327.95 4723.97,1638.98 4562.55,1800.39 4562.55,1906.69 ; v1(4570.42,2422.44) 4570.42,2375.2 4562.55,2367.32 4562.55,1906.69
  Bottom w4.02: R265.1@4286.96,1973.62 v1(4330.26,1973.62) R275.2@4376.63,1973.62 ; R275.2@4376.63,1973.62 R275.2@4376.64,1976.69 ; R275.2@4376.63,1973.62 R275.2@4376.64,1976.69 ; R275.2@4376.63,1973.62 R275.2@4376.64,1976.69 ; R275.2@4376.63,1973.62 R275.2@4376.64,1976.69 ; R275.2@4376.63,1973.62 R275.2@4376.64,1976.69
DDR_MEM_CLK0: R284.1 R285.1 U21.J8 | length 218
  Top w5: 4531.05,2764.96 4531.05,2788.58
  Top w7.01: U21.J8@4515.3,2749.21 4531.05,2764.96 ; v1(4527.11,2851.57) 4538.93,2839.76 4538.93,2804.33 4531.05,2788.58
  Bottom w7.01: v1(4527.11,2851.57) R285.1@4527.12,2887.01 R284.1@4527.12,2953.94
DDR_MEM_CLK1: R286.1 R287.1 U22.J8 | length 218.5
  Top w5: 4531.05,1481.5 4531.05,1505.12
  Top w7.01: U22.J8@4515.3,1465.75 4531.05,1481.5 ; v1(4527.11,1568.11) 4538.93,1556.3 4538.93,1516.93 4531.05,1505.12
  Bottom w7.01: v1(4527.11,1568.11) R287.1@4527.12,1603.54 R286.1@4527.12,1670.47
DDR_MEM_D0: R76.2 U21.G8 | length 523.5
  Top w4.02: R76.2@4017.93,2875.2 4389.32,2875.2 4428.69,2835.83 4428.69,2800.39 4436.56,2792.52 4436.56,2764.96 U21.G8@4452.31,2749.21
DDR_MEM_D1: R230.2 U21.G2 | length 768.9
  Top w4.02: v1(4428.69,2446.06) 4428.69,2505.12 4436.56,2512.99 4436.56,2544.49 U21.G2@4452.31,2560.24
  Bottom w4.02: R230.2@4017.93,2131.1 4046.8,2131.1 4101.92,2186.22 4101.92,2363.39 4184.59,2446.06 v1(4428.69,2446.06)
DDR_MEM_D2: R223.2 U21.H7 | length 618
  Top w4.02: v1(4483.81,2674.41) U21.H7@4483.81,2717.72
  Signal 3 w4.02: v1(4066.48,2646.85) 4176.72,2757.09 4436.56,2757.09 4483.81,2709.84 v1(4483.81,2674.41)
  Bottom w4.02: R223.2@4017.93,2627.17 4046.8,2627.17 v1(4066.48,2646.85)
DDR_MEM_D3: R226.2 U21.H3 | length 756.1
  Top w4.02: U21.H3@4483.81,2591.73 v1(4483.81,2635.04)
  Signal 3 w4.02: v1(4046.8,2272.83) 4074.36,2300.39 4074.36,2438.19 4180.66,2544.49 4420.82,2544.49 4483.81,2607.48 v1(4483.81,2635.04)
  Bottom w4.02: R226.2@4017.93,2272.83 v1(4046.8,2272.83)
DDR_MEM_D4: R231.2 U21.H1 | length 711.9
  Top w4.02: v1(4483.81,2469.68) U21.H1@4483.81,2528.74
  Bottom w4.02: R231.2@4017.93,2201.97 4042.86,2201.97 4082.23,2241.34 4082.23,2371.26 4180.66,2469.68 v1(4483.81,2469.68)
DDR_MEM_D5: R221.2 U21.H9 | length 545.4
  Top w4.02: U21.H9@4483.81,2780.71 v1(4483.81,2835.83)
  Bottom w4.02: R221.2@4017.93,2839.76 4046.8,2839.76 4074.36,2867.32 4452.31,2867.32 v1(4483.81,2835.83)
DDR_MEM_D6: R85.2 U21.F1 | length 649.8
  Top w4.02: R85.2@4017.93,2166.53 4046.8,2166.54 4109.79,2229.53 4109.79,2359.45 4200.34,2450 4377.51,2450 4412.94,2485.43 4412.94,2520.87 U21.F1@4420.82,2528.74
DDR_MEM_D7: R77.2 U21.F9 | length 479.1
  Top w4.02: R77.2@4017.93,2804.33 4042.86,2804.33 4097.98,2859.45 4377.51,2859.45 4412.94,2824.02 4412.94,2788.58 U21.F9@4420.82,2780.71
DDR_MEM_D8: R224.2 U21.C8 | length 427.7
  Top w4.02: v1(4294.83,2820.08) 4294.83,2804.33 4310.58,2788.58 4310.58,2764.96 U21.C8@4326.33,2749.21
  Bottom w4.02: R224.2@4017.93,2698.03 4042.86,2698.03 4184.59,2839.76 4275.15,2839.76 v1(4294.83,2820.08)
DDR_MEM_D9: R83.2 U21.C2 | length 383.4
  Top w4.02: R83.2@4017.93,2379.13 4050.74,2379.13 4216.09,2544.49 4310.58,2544.49 U21.C2@4326.33,2560.24
DDR_MEM_D10: R82.2 U21.D7 | length 476.1
  Top w4.02: R82.2@4017.93,2450 4046.8,2450 4251.52,2654.72 4338.14,2654.72 4357.82,2674.41 U21.D7@4357.82,2717.72
DDR_MEM_D11: R227.2 U21.D3 | length 461.5
  Top w4.02: U21.D3@4357.82,2591.73 v1(4357.82,2635.04)
  Bottom w4.02: R227.2@4017.93,2485.43 4078.3,2485.43 4247.59,2654.72 4338.14,2654.72 v1(4357.82,2635.04)
DDR_MEM_D12: R86.2 U21.D1 | length 534.4
  Top w4.02: R86.2@4017.93,2237.4 4046.8,2237.4 4094.04,2284.65 4094.04,2367.32 4192.47,2465.75 4338.14,2465.75 4357.82,2485.43 U21.D1@4357.82,2528.74
DDR_MEM_D13: R78.2 U21.D9 | length 427.8
  Top w4.02: R78.2@4017.93,2733.46 4050.74,2733.46 4160.97,2843.7 4322.39,2843.7 4349.95,2816.14 4349.95,2788.58 U21.D9@4357.82,2780.71
DDR_MEM_D14: R84.2 U21.B1 | length 409.7
  Top w4.02: R84.2@4017.93,2308.27 4046.8,2308.27 4074.36,2335.83 4074.36,2375.2 4180.66,2481.5 4279.08,2481.5 4294.83,2497.24 U21.B1@4294.83,2528.74
DDR_MEM_D15: R79.2 U21.B9 | length 325.8
  Top w4.02: R79.2@4017.93,2662.6 4046.8,2662.6 4149.16,2764.96 4279.08,2764.96 U21.B9@4294.83,2780.71
DDR_MEM_D16: R87.2 U22.G8 | length 711.1
  Top w4.02: R87.2@4021.87,1859.45 4054.67,1859.45 4074.36,1839.76 4074.36,1796.46 4141.29,1729.53 4141.29,1635.04 4184.59,1591.73 4389.32,1591.73 4428.69,1552.36 4428.69,1516.93 4436.56,1509.06 4436.56,1481.5 U22.G8@4452.31,1465.75
DDR_MEM_D17: R97.2 U22.G2 | length 519.5
  Top w4.02: R97.2@4021.87,1150.79 4389.32,1150.79 4428.69,1190.16 4428.69,1221.65 4436.56,1229.53 4436.56,1261.02 U22.G2@4452.31,1276.77
DDR_MEM_D18: R237.2 U22.H7 | length 617.3
  Top w4.02: v1(4483.81,1390.94) U22.H7@4483.81,1434.25
  Signal 3 w4.02: v1(4050.74,1611.42) 4188.53,1473.62 4436.56,1473.62 4483.81,1426.38 v1(4483.81,1390.94)
  Bottom w4.02: R237.2@4021.87,1611.42 v1(4050.74,1611.42)
DDR_MEM_D19: R241.2 U22.H3 | length 560.5
  Top w4.02: U22.H3@4483.81,1308.27 v1(4483.81,1351.57)
  Signal 3 w4.02: v1(4050.74,1257.09) 4416.88,1257.09 4483.81,1324.02 v1(4483.81,1351.57)
  Bottom w4.02: R241.2@4021.87,1257.09 v1(4050.74,1257.09)
DDR_MEM_D20: R242.2 U22.H1 | length 521
  Top w4.02: v1(4483.81,1186.22) U22.H1@4483.81,1245.28
  Bottom w4.02: R242.2@4021.87,1186.22 v1(4050.74,1186.22) v1(4483.81,1186.22)
DDR_MEM_D21: R233.2 U22.H9 | length 751.2
  Top w4.02: U22.H9@4483.81,1497.24 v1(4483.81,1552.36)
  Bottom w4.02: R233.2@4021.87,1894.88 4042.86,1894.88 4086.17,1851.57 4086.17,1694.09 4196.41,1583.86 4452.31,1583.86 v1(4483.81,1552.36)
DDR_MEM_D22: R96.2 U22.F1 | length 475.1
  Top w4.02: R96.2@4021.87,1221.65 4137.35,1221.65 4192.47,1166.54 4377.51,1166.54 4412.94,1201.97 4412.94,1237.4 U22.F1@4420.82,1245.28
DDR_MEM_D23: R88.2 U22.F9 | length 593.4
  Top w4.02: R88.2@4021.87,1788.58 4050.74,1788.58 4125.54,1713.78 4125.54,1623.23 4172.78,1575.98 4377.51,1575.98 4412.94,1540.55 4412.94,1505.12 U22.F9@4420.82,1497.24
DDR_MEM_D24: R235.2 U22.C8 | length 417.2
  Top w4.02: v1(4294.83,1536.61) 4294.83,1520.87 4310.58,1505.12 4310.58,1481.5 U22.C8@4326.33,1465.75
  Bottom w4.02: R235.2@4021.87,1682.28 4058.61,1682.28 4184.59,1556.3 4275.15,1556.3 v1(4294.83,1536.61)
DDR_MEM_D25: R93.2 U22.C2 | length 382.7
  Top w4.02: R93.2@4021.87,1434.25 4054.67,1434.25 4227.9,1261.02 4310.58,1261.02 U22.C2@4326.33,1276.77
DDR_MEM_D26: R91.2 U22.D7 | length 442.9
  Top w4.02: R91.2@4021.87,1505.12 4054.67,1505.12 4188.53,1371.26 4338.14,1371.26 4357.82,1390.94 U22.D7@4357.82,1434.25
DDR_MEM_D27: R238.2 U22.D3 | length 428.2
  Top w4.02: U22.D3@4357.82,1308.27 v1(4357.82,1351.57)
  Signal 3 w4.02: v1(4050.74,1469.68) 4137.35,1383.07 4298.77,1383.07 4314.52,1367.32 4342.08,1367.32 v1(4357.82,1351.57)
  Bottom w4.02: R238.2@4021.87,1469.68 v1(4050.74,1469.68)
DDR_MEM_D28: R94.2 U22.D1 | length 433.1
  Top w4.02: R94.2@4021.87,1292.52 4097.98,1292.52 4208.22,1182.28 4338.14,1182.28 4357.82,1201.97 U22.D1@4357.82,1245.28
DDR_MEM_D29: R234.2 U22.D9 | length 506.5
  Top w4.02: v1(4050.74,1753.15) 4109.79,1694.09 4109.79,1611.42 4160.97,1560.24 4322.39,1560.24 4349.95,1532.68 4349.95,1505.12 U22.D9@4357.82,1497.24
  Bottom w4.02: R234.2@4021.87,1753.15 v1(4050.74,1753.15)
DDR_MEM_D30: R95.2 U22.B1 | length 379.5
  Top w4.02: R95.2@4021.87,1363.39 4062.55,1363.39 4227.9,1198.03 4279.08,1198.03 4294.83,1213.78 U22.B1@4294.83,1245.28
DDR_MEM_D31: R89.2 U22.B9 | length 448.8
  Top w4.02: R89.2@4021.87,1717.72 4050.74,1717.72 4094.04,1674.41 4094.04,1552.36 4164.91,1481.5 4279.08,1481.5 U22.B9@4294.83,1497.24
DDR_MEM_L\D\Q\S\0\: R194.2 R222.1 U21.E8 | length 658.2
  Top w4.02: v1(4365.7,2835.83) 4365.7,2800.39 4373.57,2792.52 4373.57,2764.96 U21.E8@4389.32,2749.21
  Signal 3 w4.02: v1(3932.63,2768.9) 4015.3,2851.57 4349.95,2851.57 v1(4365.7,2835.83)
  Bottom w4.02: R194.2@3888.01,2768.9 v1(3932.63,2768.9) R222.1@3975.93,2768.9
DDR_MEM_L\D\Q\S\1\: R55.2 R80.1 U21.A8 | length 440.5
  Top w4.02: R55.2@3888.01,2591.73 R80.1@3975.93,2591.73 4003.49,2619.29 4078.3,2619.29 4208.22,2749.21 U21.A8@4263.34,2749.21
DDR_MEM_LDM0: R200.2 R229.1 U21.F3 | length 758.5
  Top w4.02: U21.F3@4420.82,2591.73 v1(4420.82,2635.04)
  Signal 3 w4.02: v1(3932.63,2343.7) 4153.1,2564.17 4381.45,2564.17 4420.82,2603.54 v1(4420.82,2635.04)
  Bottom w4.02: R200.2@3888.01,2343.7 v1(3932.63,2343.7) R229.1@3975.93,2343.7
DDR_MEM_LDM1: R211.2 R239.1 U22.F3 | length 680.9
  Top w4.02: U22.F3@4420.82,1308.27 v1(4420.82,1351.57)
  Signal 3 w4.02: v1(3932.63,1327.95) 3960.19,1327.95 3995.62,1292.52 4393.26,1292.52 4420.82,1320.08 v1(4420.82,1351.57)
  Bottom w4.02: R211.2@3888.01,1327.95 v1(3932.63,1327.95) R239.1@3979.87,1327.95
DDR_MEM_LDQS0: R197.2 R225.1 U21.F7 | length 733.4
  Top w4.02: v1(4420.82,2674.41) U21.F7@4420.82,2717.72
  Signal 3 w4.02: v1(3932.63,2556.3) 3995.62,2619.29 4082.23,2619.29 4196.41,2733.46 4389.32,2733.46 4420.82,2701.97 v1(4420.82,2674.41)
  Bottom w4.02: R197.2@3888.01,2556.3 v1(3932.63,2556.3) R225.1@3975.93,2556.3
DDR_MEM_LDQS1: R57.2 R81.1 U21.B7 | length 527.3
  Top w4.02: R57.2@3888.01,2520.87 R81.1@3975.93,2520.87 4003.49,2493.31 4062.55,2493.31 4239.71,2670.47 4275.15,2670.47 4294.83,2690.16 U21.B7@4294.83,2717.72
DDR_MEM_ODT_CONTROL: R112.2 U21.K9 U22.K9 | length 2036.6
  Top w4.02: R112.2@4285.66,1654.72 4542.86,1654.72 v1(4554.67,1642.91) 4554.67,1505.12 U22.K9@4546.8,1497.24 ; U21.K9@4546.8,2780.71 4554.67,2788.58 v1(4554.67,2926.38)
  Signal 10 w4.02: v1(4554.67,1642.91) 4554.67,2217.72 4731.84,2394.88 4731.84,2694.09 4692.47,2733.46 4633.41,2733.46 4554.67,2812.2 v1(4554.67,2926.38)
DDR_MEM_R\A\S\: R113.1 U21.K7 U22.K7 | length 1977
  Top w4.02: R113.1@4416.88,1867.32 v1(4739.71,1867.32) ; v1(4546.8,1390.94) U22.K7@4546.8,1434.25 ; v1(4546.8,2674.41) U21.K7@4546.8,2717.72
  Signal 9 w4.02: v1(4546.8,1390.94) 4546.8,1422.44 4601.92,1477.56 4668.85,1477.56 4723.97,1532.68 4723.97,1753.15 4716.09,1761.02 4716.09,1843.7 v1(4739.71,1867.32) 4759.4,1887.01 4759.4,2012.99 4727.9,2044.49 4727.9,2599.61 4688.53,2638.98 4582.23,2638.98 v1(4546.8,2674.41)
DDR_MEM_U\D\Q\S\0\: R204.2 R232.1 U22.E8 | length 786.9
  Top w4.02: v1(4365.7,1552.36) 4365.7,1516.93 4373.57,1509.06 4373.57,1481.5 U22.E8@4389.32,1465.75
  Signal 3 w4.02: v1(3932.63,1824.02) 3956.25,1824.02 3991.68,1788.58 4062.55,1788.58 4078.3,1772.83 4078.3,1682.28 4192.47,1568.11 4349.95,1568.11 v1(4365.7,1552.36)
  Bottom w4.02: R204.2@3888.01,1824.02 v1(3932.63,1824.02) R232.1@3979.87,1824.02
DDR_MEM_U\D\Q\S\1\: R65.2 R90.1 U22.A8 | length 540
  Top w4.02: R65.2@3888.01,1646.85 R90.1@3979.87,1646.85 4007.43,1674.41 4058.61,1674.41 4078.3,1654.72 4078.3,1540.55 4153.1,1465.75 U22.A8@4263.34,1465.75
DDR_MEM_UDM0: R199.2 R228.1 U21.B3 | length 595.3
  Top w4.02: U21.B3@4294.83,2591.73 v1(4294.83,2631.1)
  Signal 3 w4.02: v1(3932.63,2414.57) 3979.87,2414.57 4149.16,2583.86 4275.15,2583.86 4294.83,2603.54 v1(4294.83,2631.1)
  Bottom w4.02: R199.2@3888.01,2414.57 v1(3932.63,2414.57) R228.1@3975.93,2414.57
DDR_MEM_UDM1: R212.2 R240.1 U22.B3 | length 561.6
  Top w4.02: U22.B3@4294.83,1308.27 v1(4294.83,1347.64)
  Signal 3 w4.02: v1(3932.62,1397.62) v1@3932.62,1398.81 ; v1@3932.63,1398.82 3960.19,1398.82 3995.62,1363.39 4279.08,1363.39 v1(4294.83,1347.64)
  Bottom w4.02: v1(3932.62,1397.62) v1@3932.62,1398.81 ; R240.1@3979.87,1398.82 v1@3932.63,1398.82 ; v1@3932.63,1398.82 R212.2@3888.01,1398.82 v1@3932.62,1398.82
DDR_MEM_UDQS0: R209.2 R236.1 U22.F7 | length 748.5
  Top w4.02: v1(4420.82,1390.94) U22.F7@4420.82,1434.25
  Signal 3 w4.02: v1(3932.62,1541.74) 3932.62,1540.56 3968.06,1505.12 4066.48,1505.12 4121.6,1450 4389.32,1450 4420.82,1418.5 v1(4420.82,1390.94)
  Bottom w4.02: v1(3932.62,1541.74) v1@3932.62,1540.56 ; R236.1@3979.87,1540.55 v1@3932.63,1540.55 ; v1@3932.63,1540.55 R209.2@3888.01,1540.55 v1@3932.62,1540.55
DDR_MEM_UDQS1: R67.2 R92.1 U22.B7 | length 520.8
  Top w4.02: R67.2@3888.01,1575.98 R92.1@3979.87,1575.98 4015.3,1540.55 4046.8,1540.55 4200.34,1387.01 4275.15,1387.01 4294.83,1406.69 U22.B7@4294.83,1434.25
DDR_MEM_W\E\: R278.1 U21.K3 U22.K3 | length 1943.2
  Top w4.02: U22.K3@4546.8,1308.27 v1(4546.8,1351.57) ; U21.K3@4546.8,2591.73 v1(4546.8,2635.04)
  Signal 3 w4.02: v1(4546.8,1351.57) 4582.23,1387.01 4688.53,1387.01 4723.97,1422.44 4723.97,1753.15 4716.09,1761.02 4716.09,1887.01 v1(4731.84,1902.76) 4731.84,1953.94 4700.34,1985.43 4700.34,2044.49 4716.09,2060.24 4716.09,2410.63 4672.78,2453.94 4672.78,2512.99 4649.16,2536.61 4609.79,2536.61 4546.8,2599.61 v1(4546.8,2635.04)
  Bottom w4.02: R278.1@4416.88,1902.76 v1(4731.84,1902.76)
DDR_ODT_CONTROL: R112.1 U11.M10 | length 1463.3
  Top w4.02: U11.M10@3086.17,2131.1 v1(3105.86,2111.42) ; v1(3669.01,1913.19) 3670.38,1914.57 4046.8,1914.57 4097.98,1863.39 4097.98,1800.39 R112.1@4243.65,1654.72
  Signal 3 w4.02: v1(3105.86,2111.42) 3126,2091.27 3126,1971 3163,1934 3470,1934 3490.81,1913.19 3645.52,1913.19 v1(3669.01,1913.19)
DDR_R\A\S\: R108.1 R113.2 U11.K2 | length 1051.2
  Top w4.02: U11.K2@3401.13,2052.36 3421.8,2031.69 3575.58,2031.69 3576.56,2032.67 3749.2,2032.67 3824,1957.87 4129.48,1957.87 4176.72,1910.63 4243.65,1910.63 R108.1@4286.96,1867.32 R113.2@4374.88,1867.32
DDR_U\D\Q\S\0\: R204.1 U11.V2 | length 883.1
  Top w4.02: U11.V2@3401.13,2367.32 v1(3420.82,2387.01)
  Signal 10 w4.02: 3630.95,2275.29 v1(3630.95,2307.69) ; 3631.34,2274.91 3794.83,2111.42 3794.83,1847.64 3818.1,1824.37 3818.44,1824.03 v1(3818.44,1824.72)
  Signal 6 w4.02: v1(3420.82,2387.01) 3506,2387.01 3515.84,2396.85 3566.32,2396.85 3630.95,2332.22 v1(3630.95,2307.69)
  Bottom w4.02: v1@3818.45,1824.02 R204.1@3846.01,1824.02 ; v1@3818.44,1824.03 v1(3818.44,1824.72)
DDR_U\D\Q\S\1\: R65.1 U11.R6 | length 1146
  Top w4.02: U11.R6@3243.65,2249.21 v1(3263.34,2268.9) ; v1(3800.26,1662.2) 3815.62,1646.85 R65.1@3846.01,1646.85
  Signal 9 w4.02: v1(3263.34,2268.9) 3283.23,2249 3528,2249 3545.62,2231.38 3604.77,2231.38 3604.89,2231.5 3652.78,2231.5 3837.27,2047.01 3837.27,1699.21 v1(3800.26,1662.2)
DDR_UDM0: R199.1 U11.T10 | length 850.1
  Top w4.02: U11.T10@3086.17,2288.58 v1(3105.86,2268.9)
  Bottom w4.02: v1(3105.86,2268.9) 3124.96,2288 3643,2288 3666.33,2311.33 3666.33,2332.65 3748.25,2414.57 R199.1@3846.01,2414.57 R199.1@3839.46,2408.02
DDR_UDM1: R212.1 U11.P4 | length 1154
  Top w4.02: U11.P4@3322.39,2209.84 v1(3342.08,2229.53)
  Signal 9 w4.02: v1(3568,2050) 3574.36,2043.64 3574.36,1642.91 v1(3818.45,1398.82)
  Signal 10 w4.02: v1(3342.08,2229.53) 3362.6,2209 3483,2209 3529,2163 3529,2122 3568,2083 v1(3568,2050)
  Bottom w4.02: v1(3818.45,1398.82) R212.1@3846.01,1398.82
DDR_UDQS0: R209.1 U11.V1 | length 1085.2
  Top w4.02: U11.V1@3440.5,2367.32 3505.36,2367.32 3524.3,2348.38 3567.51,2305.18 3567.51,2146.75 3558.2,2137.44 v1(3558.2,2126.13)
  Signal 10 w4.02: v1@3560.01,2127.93 3664.07,2023.87 3704.53,2023.87 3733.92,1994.47 3733.92,1979.31 3729.23,1974.62 3729.23,1629.78 v1(3818.45,1540.55)
  Bottom w4.02: v1(3818.45,1540.55) R209.1@3846.01,1540.55
DDR_UDQS1: R67.1 U11.R5 | length 1101.4
  Top w4.02: U11.R5@3283.02,2249.21 v1(3302.71,2229.53) ; v1(3818.45,1575.98) R67.1@3846.01,1575.98
  Signal 9 w4.02: v1(3637.16,2171.32) 3641.01,2167.47 3641.01,2115.47 3761.64,1994.84 3761.64,1632.8 v1(3818.45,1575.98)
  Signal 6 w4.02: v1(3302.71,2229.53) 3323.18,2250 3558.47,2250 v1(3637.16,2171.32)
DDR_W\E\: R266.1 R278.2 U11.K4 | length 1157.8
  Top w4.02: U11.K4@3322.39,2052.36 v1(3342.08,2032.67)
  Signal 3 w4.02: v1(3342.08,2032.67) 3361.76,2012.99 3521.51,2012.99 3588.09,1946.41 4070.07,1946.41 4105.85,1910.63 4263.34,1910.63 4271.21,1902.76 v1(4330.26,1902.76)
  Bottom w4.02: R266.1@4286.96,1902.76 v1(4330.26,1902.76) R278.2@4374.88,1902.76
DEBUG_RX: U11.A4 U23.9 | length 2189.2
  Top w5.91: U11.A4@3322.39,1698.03 3342.08,1678.34 3342.08,1592.92 3430,1505 3488,1505 3589,1404 3589,1084 3629,1044 4659,1044 4671,1032 4671,906 4745.06,831.94 U23.9@4841.56,831.94
DEBUG_TX: U11.A3 U23.11 | length 2069.1
  Top w5.91: U11.A3@3361.76,1698.03 3361.76,1682.62 3606,1438.38 3606,1123 3662,1067 4660,1067 4703,1024 4703,925 4744.86,883.14 U23.11@4841.56,883.14
DIN: J2.1 U11.N19 | length 2640.4
  Top w5.91: U11.N19@2731.84,2170.47 v1(2751.53,2190.16)
  Signal 7 w5.91: J2.1@223.1,2026.34 406.61,2209.84 2731.84,2209.84 v1(2751.53,2190.16)
DINA: J3.8 U11.E21 | length 3461.9
  Top w5.91: U11.E21@2653.1,1855.51 v1(2672.79,1875.2)
  Signal 3 w5.91: v1(2672.79,1875.2) 2692.47,1894.88 3470.12,1894.88 3481.87,1883.13 3481.87,1847.13 3509,1820 3545,1820 3592,1773 3592,1501 3723,1370 3723,997 3891,829 4207,829 4305.57,730.43 5163.94,730.43 J3.8@5201.74,768.22
DINB: J5.8 U11.Y9 | length 2745.9
  Top w5.91: v1(3105.85,2465.75) U11.Y9@3125.54,2446.06
  Signal 6 w5.91: v1(3105.85,2465.75) 3086,2485.6 3086,2913.23 3384.77,3212 3564,3212 3926,3574 4864,3574 4922,3632 4989.52,3632 J5.8@5032.74,3675.22
DIR_IN: J6.4 U11.AE23 | length 2933.1
  Top w5.91: v1(2554.67,2662.6) U11.AE23@2574.36,2642.91
  Signal 6 w5.91: J6.4@144.36,3808.34 183.7,3769 359,3769 801.7,3326.3 1925.81,3326.3 2534.99,2717.12 2534.99,2682.28 v1(2554.67,2662.6)
DONE: Q4.1 R31.1 U11.AB21 | length 1234.6
  Top w5.91: Q4.1@2446.5,3564.17 R31.1@2538.93,3564.17 2539.07,3564.03 v1(2577.93,3564.03) ; v1(2633.41,2544.49) U11.AB21@2653.1,2524.8
  Signal 6 w5.91: v1(2577.93,3564.03) 2577.93,3500.07 2673,3405 2673,2737.03 2653.1,2717.12 2653.1,2564.17 v1(2633.41,2544.49)
DOOR_EN: J6.12 U11.AA25 | length 2824.8
  Top w5.91: U11.AA25@2495.62,2485.43 v1(2515.3,2505.12)
  Signal 6 w5.91: J6.12@144.36,3493.38 206.74,3431 526,3431 1472,2485 2495.19,2485 v1(2515.3,2505.12)
DOUTA: J3.10 U11.F19 | length 3509.3
  Top w5.91: v1(2712.15,1914.57) U11.F19@2731.84,1894.88
  Signal 4 w5.91: v1(2712.15,1914.57) 2731.84,1934.25 4006.75,1934.25 4118,1823 4118,966 4274.83,809.17 5163.94,809.17 J3.10@5201.74,846.96
DOUTB: J5.10 U11.AE3 | length 2232.9
  Top w5.91: U11.AE3@3361.76,2642.91 v1(3381.45,2662.6)
  Signal 3 w5.91: v1(3381.45,2662.6) 3521.85,2803 3582,2803 3739,2960 4359,2960 4877,3478 4877,3651.67 4938.34,3713.02 4991.79,3713.02 J5.10@5032.74,3753.96
EGND: C16.1 C252.1 J1.5 J8.5 L2.2 MT1.1 MT2.1 MT3.1 MT4.1 R9.2 R294.2 | length 484.9
  Top w20: v1(531,2720) 650,2720 662.74,2732.74 C16.1@662.74,2840.97 ; v1(5000.48,4034.76) 4960.48,4034.76 4959.18,4036.06 L2.2@4959.18,4065 4960.48,4066.29 4960.48,4099.76 v1(5000.48,4099.76)
  Bottom w20: R294.2@4932.63,1789.46 v1(4932.63,1835.83) C252.1@4932.63,1883.07
FILTER_EN: J6.10 U11.Y23 | length 2935.8
  Top w5.91: U11.Y23@2574.36,2446.06 v1(2594.04,2465.75)
  Signal 4 w5.91: J6.10@144.36,3572.12 182.48,3534 409,3534 1457.57,2485.43 2574.36,2485.43 v1(2594.04,2465.75)